# Altium PCB PSW V4_VayTay.PcbDoc
Units mm, origin at the board's own origin, x right, y up, seen from the top; angles counter-clockwise.
Board outline 37.08 x 10 mm, 2 copper layers (Top Layer, Bottom Layer); 17 components, 15 nets, 62 pads, 9 vias.
Unrouted connection lines stored in the file: 2.
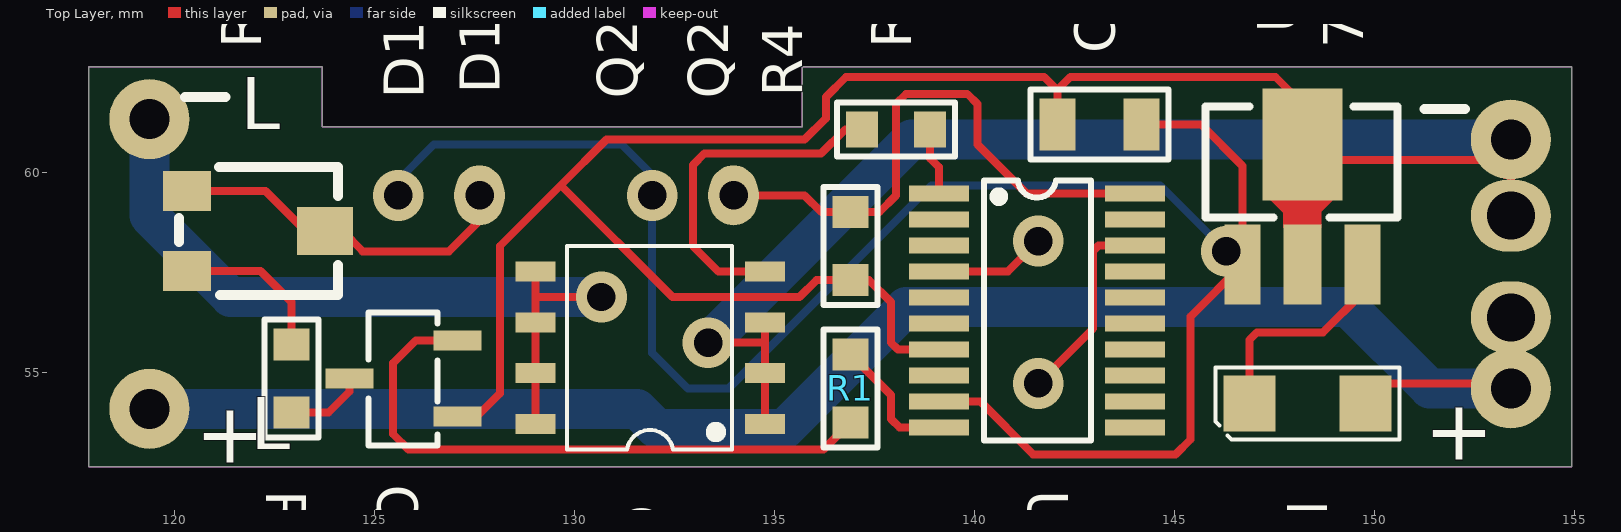
[diagram p0: Top Layer view]
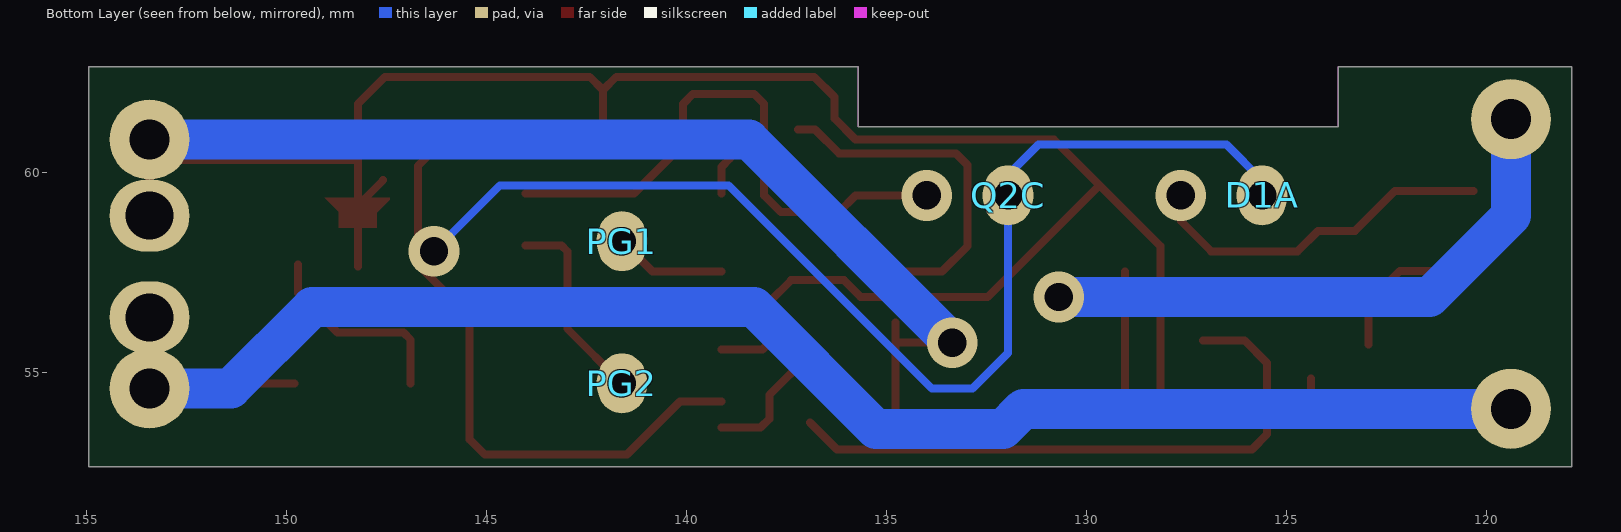
[diagram p1: Bottom Layer view, seen from below]

## Layer stack, top to bottom
Top Solder: solder mask 0.0102, Solder Resist, Dk 3.5
Top Layer: signal copper 0.0356
Dielectric 1: dielectric 0.32, FR-4, Dk 4.8
Bottom Layer: signal copper 0.0356
Bottom Solder: solder mask 0.0102, Solder Resist, Dk 3.5

## Board outline
117.861,52.657 117.861,62.657 123.698,62.657 123.698,61.157 135.698,61.157 135.698,62.657 154.94,62.657 154.94,52.657

## Design rules (kind name [scope] priority, off if disabled: settings)
Clearance [All] p1: gap=0.15 ignorepadtopadclearanceinfootprint=FALSE except(0: Arc-Hole Track-Hole SMDPad-Hole THPad-Hole Via-Hole Fill-Hole Poly-Hole Region-Hole Text-Hole)
PolygonConnect [All] p1: connectstyle=Relief reliefconductorwidth=0.254 reliefentries=4 polygonreliefangle="90 Angle" airgapwidth=0.254
RoutingVias [All] p1: holewidth=0.711 width=1.27 viastyle="Through Hole" minholewidth=0.711 minwidth=1.27 maxholewidth=0.711 maxwidth=1.27
SolderMaskExpansion [All] p1: expansion=0.102
Width [All] p1: maxlimit=1.5 minlimit=0.2 preferedwidth=0.35 minimp=50.000000 maximp=50.000000 favimp=50.000000
30 further rules are at their usual default settings.

## Classes and differential pairs
component class PMSW: R3 U1

## Components (designator, comment, footprint, x,y, rotation, side; value= is the part's Value field where it differs from the comment)
C1 "106" CR0805 143.129,61.214 r0 top
D1 "1N4001" DO219AB 148.336,54.229 r180 top
D1A "Comment" SMD-Port#1 125.603,59.436 r90 bottom
D1K "Comment" SMD-Port#2 127.635,59.436 r90 top
PG1 "NRST" SMD-Port#3 141.605,58.293 r90 bottom
PG2 "SWIM" SMD-Port#4 141.605,54.737 r90 bottom
Q1 "C1815" SOT23 125.73,54.864 r180 top
Q2C "Comment" SMD-Port#5 131.953,59.436 r90 bottom
Q2E "Comment" SMD-Port#6 133.985,59.436 r90 top
Q3 "AO4402G" SOIC8 134.772,53.721 r180 top
R1 "1K" CR0603 136.906,54.61 r90 top
R2 "100" CR0603 122.936,54.864 r90 top
R3 "VR1K" VRSMD 122.047,58.547 r270 top (schematic designator R1)
R4 "10K" CR0603 136.906,58.166 r90 top
R5 "1K" CR0603 138.049,61.087 r180 top
U1 "7805-SOT89" SOT89 148.209,57.706 r90 top (schematic designator U2)
U2 "STM8S003" TSSOP20 139.118,59.481 r0 top

## Footprints (in the part's own frame and the unit in brackets; to place one, negate y for a bottom-side part, rotate by r counter-clockwise, add the part's x,y. Pads: shape width x height; smd on the part's side, far side on the other; paste and mask are expansions set on the pad)
CR0603 [mm]
  rect 0.8x0.9 smd: 1(-0.85,0) 2(0.85,0)
  silkscreen extent -1.48,-0.67 1.48,0.67
CR0805 [mm]
  rect 0.9x1.3 smd: 1(-1.05,0) 2(1.05,0)
  silkscreen extent -1.73,-0.87 1.73,0.87
DO219AB [mm]
  rect 1.3x1.4 smd: A(-1.45,0) K(1.45,0)
  silkscreen extent -2.3,-0.9 2.3,0.9
SMD-Port#1 [mm]
  oval 1.5x1.2 smd: D2A(0,0)
SMD-Port#2 [mm]
  oval 1.5x1.2 smd: D2K(0,0)
SMD-Port#3 [mm]
  oval 1.5x1.2 smd: PG1(0,0)
SMD-Port#4 [mm]
  oval 1.5x1.2 smd: PG2(0,0)
SMD-Port#5 [mm]
  oval 1.5x1.2 smd: Q2C(0,0)
SMD-Port#6 [mm]
  oval 1.5x1.2 smd: Q2E(0,0)
SOIC8 [mm]
  rect 1x0.5 smd: 1(0,0) 2(0,-1.27) 3(0,-2.54) 4(0,-3.81) 5(5.74,-3.81) 6(5.74,-2.54) 7(5.74,-1.27) 8(5.74,0)
  silkscreen extent 0.82,-4.44 4.95,0.64
SOT23 [mm]
  rect 1.2x0.5 smd: 1(-1.35,0.95) 2(1.35,0) 3(-1.35,-0.95)
  silkscreen extent -0.85,-1.65 0.87,1.68
SOT89 [mm]
  rect 2x0.9 smd mask+0.102: 1(0,-1.5)
  rect 2x0.96 smd: 2(0,0)
  rect 2.8x2 smd: 2(3,0)
  rect 2x0.9 smd: 3(0,1.5)
  Top Layer region: 0.925,0.475 1.3,0.475 1.625,0.8 1.675,0.8 1.675,-0.825 1.325,-0.475 0.925,-0.475
  silkscreen extent 1.18,-2.38 3.95,2.42
TSSOP20 [mm]
  rect 1.5x0.4 smd: 1(0,0) 2(0,-0.65) 3(0,-1.3) 4(0,-1.95) 5(0,-2.6) 6(0,-3.25) 7(0,-3.9) 8(0,-4.55) 9(0,-5.2) 10(0,-5.85) 11(4.9,-5.85) 12(4.9,-5.2) 13(4.9,-4.55) 14(4.9,-3.9) 15(4.9,-3.25) 16(4.9,-2.6) 17(4.9,-1.95) 18(4.9,-1.3) 19(4.9,-0.65) 20(4.9,0)
  silkscreen extent 1.12,-6.18 3.8,0.33
VRSMD [mm]
  rect 1x1.2 smd: 1(-1,-1.725) 2(1,-1.725)
  rect 1.2x1.4 smd: 3(0,1.725)
  silkscreen extent -1.6,-1.93 1.6,2.05

## Part data
R3: library part VRES
U1: library part 7805

## Free pads (board coordinates)
  round 2 hole 1: 0(119.38,54.102) 0(153.416,54.61) 1(119.38,61.341) 1(153.416,60.833)
  oval 2x1.8 hole 1.2: 0(153.416,56.388) 0(153.416,58.928)

## Via types
v1: diameter 1.27, hole 0.711, Top Layer to Bottom Layer, 9 vias

## Nets (pads, with @x,y where several pads share a name; then routed paths per layer and width w, separated by ;. In a path a pad name is that pad's centre, name@x,y a point inside that pad or via, vN(x,y) a via of type N, cw(c..) or ccw(c..) an arc to the next point about the centre after c; other vN are vias at no path point)
Net5VCC: C1.2 D1A.D2A Q2C.Q2C U1.3 U2.9 | length 46.7
  Top Layer w0.2: U2.9 140.156,54.281 141.478,52.959 145.034,52.959 145.415,53.34 145.415,56.412 U1.3 146.709,60.174 145.669,61.214 C1.2
  Bottom Layer w0.2: v1(125.603,59.436) 125.603,59.817 126.492,60.706 131.191,60.706 131.953,59.944 v1(131.953,59.436) 131.953,55.499 132.842,54.61 133.858,54.61 138.938,59.69 144.653,59.69 v1(146.304,58.039)
Net+12V: D1.A pad.0@119.38,54.102 pad.0@153.416,54.61 pad.0@153.416,56.388 | length 41.8
  Top Layer w0.2: D1.A@149.786,54.737 153.289,54.737 153.416,54.61 pad.0@153.416,56.388
  Bottom Layer w1: pad.0@119.38,54.102 131.572,54.102 132.08,53.594 135.255,53.594 138.303,56.642 149.352,56.642 151.384,54.61 pad.0@153.416,54.61
NetD1K: D1.K U1.1 | length 5.1
  Top Layer w0.2: D1.K@146.886,54.737 146.886,55.827 147.066,56.007 148.717,56.007 149.709,56.999 U1.1
NetD2K: D1K.D2K R3.1 R3.3 | length 8.9
  Top Layer w0.2: R3.1 122.285,59.547 123.285,58.547 R3.3 124.206,58.547 124.714,58.039 126.873,58.039 127.635,58.801 v1(127.635,59.436)
NetGND: C1.1 pad.0@153.416,58.928 pad.1@153.416,60.833 Q1.1 Q3.1 Q3.2 Q3.3 R4.1 U1.2 U2.7 | length 70.9
  Top Layer w0.2: Q1.1 127.574,53.914 128.143,54.483 128.143,58.166 129.667,59.69 ; v1(133.35,55.753) 134.772,55.753 ; Q3.1 Q3.2 134.772,55.753 ; Q3.3 134.772,55.753 ; U2.7 138.094,55.581 137.922,55.753 137.922,56.769 137.375,57.316 R4.1 136.056,57.316 135.636,56.896 132.461,56.896 129.667,59.69 ; C1.1 142.079,62.069 ; U1.2@147.574,59.817 148.463,58.928 ; U1.2@148.209,60.706 148.209,61.722 147.529,62.402 142.412,62.402 142.079,62.069 ; pad.0@153.416,58.928 pad.1@153.416,60.833 ; 129.667,59.69 130.81,60.833 135.763,60.833 136.295,61.365 136.295,61.895 136.803,62.402 141.746,62.402 142.079,62.069
  Bottom Layer w1: v1(133.35,55.753) 138.43,60.833 pad.1@153.416,60.833
NetNRST: PG1.PG1 U2.4 | length 2.8
  Top Layer w0.2: U2.4 140.843,57.531 v1(141.605,58.293)
NetOUT-: pad.1@119.38,61.341 Q3.5 Q3.6 Q3.7 Q3.8 | length 20
  Top Layer w0.2: Q3.8 Q3.7 Q3.6 129.032,56.896 ; Q3.5 129.032,56.896 ; v1(130.683,56.896) 129.032,56.896
  Bottom Layer w1: pad.1@119.38,61.341 119.38,58.928 121.412,56.896 v1(130.683,56.896)
NetQ1-2: Q1.2 R2.1 | length 2
  Top Layer w0.2: R2.1 123.864,54.014 124.38,54.53 Q1.2
NetQ1-3: Q1.3 R1.1 | length 15.5
  Top Layer w0.2: Q1.3 126.045,55.814 125.476,55.245 125.476,53.467 125.857,53.086 136.232,53.086 R1.1
NetR1-2: R2.2 R3.2 | length 4
  Top Layer w0.2: R3.2 122.158,57.547 122.936,56.769 R2.2
NetR5-2: Q3.4 R5.2 | length 8.7
  Top Layer w0.2: Q3.4 133.604,57.531 132.969,58.166 132.969,60.198 133.254,60.483 136.175,60.483 136.779,61.087 R5.2
NetSWIM: PG2.PG2 U2.18 | length 5
  Top Layer w0.2: v1(141.605,54.737) 142.971,56.103 142.971,58.039 143.113,58.181 U2.18
NetU2-1: R5.1 U2.1 | length 1.7
  Top Layer w0.2: R5.1 138.899,60.364 139.118,60.145 U2.1
NetU2-10: R1.2 U2.10 | length 3.3
  Top Layer w0.2: R1.2 137.922,54.444 137.922,53.848 138.139,53.631 U2.10
NetU2-20: Q2E.Q2E R4.2 U2.20 | length 14.4
  Top Layer w0.2: v1(133.985,59.436) 135.763,59.436 136.183,59.016 R4.2 137.629,59.016 138.049,59.436 138.049,61.722 138.303,61.976 139.827,61.976 140.081,61.722 140.081,60.706 141.306,59.481 U2.20
pads on no net: U2.2 U2.3 U2.5 U2.6 U2.8 U2.11 U2.12 U2.13 U2.14 U2.15 U2.16 U2.17 U2.19
copper on no net: | length 7.9
  Top Layer w0.2: 148.209,57.658 148.209,60.325 152.908,60.325 153.289,59.944

## Keep-outs
Keep-Out Layer:
  the board outline again, w0.01

## Silkscreen, mask and mechanical layers (free items; w line width, h text height)
Top Overlay:
  lines w0.254: 120.269,61.897 121.285,61.897 ; 151.257,61.595 152.273,61.595
  text "L" at 121.666,61.087 h1.3
  text "L" at 121.92,53.086 h1.3
  text "+" at 151.257,52.832 h1.52
  text "+" at 120.523,52.753 h1.52